# Altium PCB PCB_Keyboard.pcbdoc
Units mm, origin at the board's own origin, x right, y up, seen from the top; angles counter-clockwise.
Board outline 330.48 x 294.76 mm, 2 copper layers (Top Layer, Bottom Layer); 167 components, 120 nets, 594 pads, 52 vias.
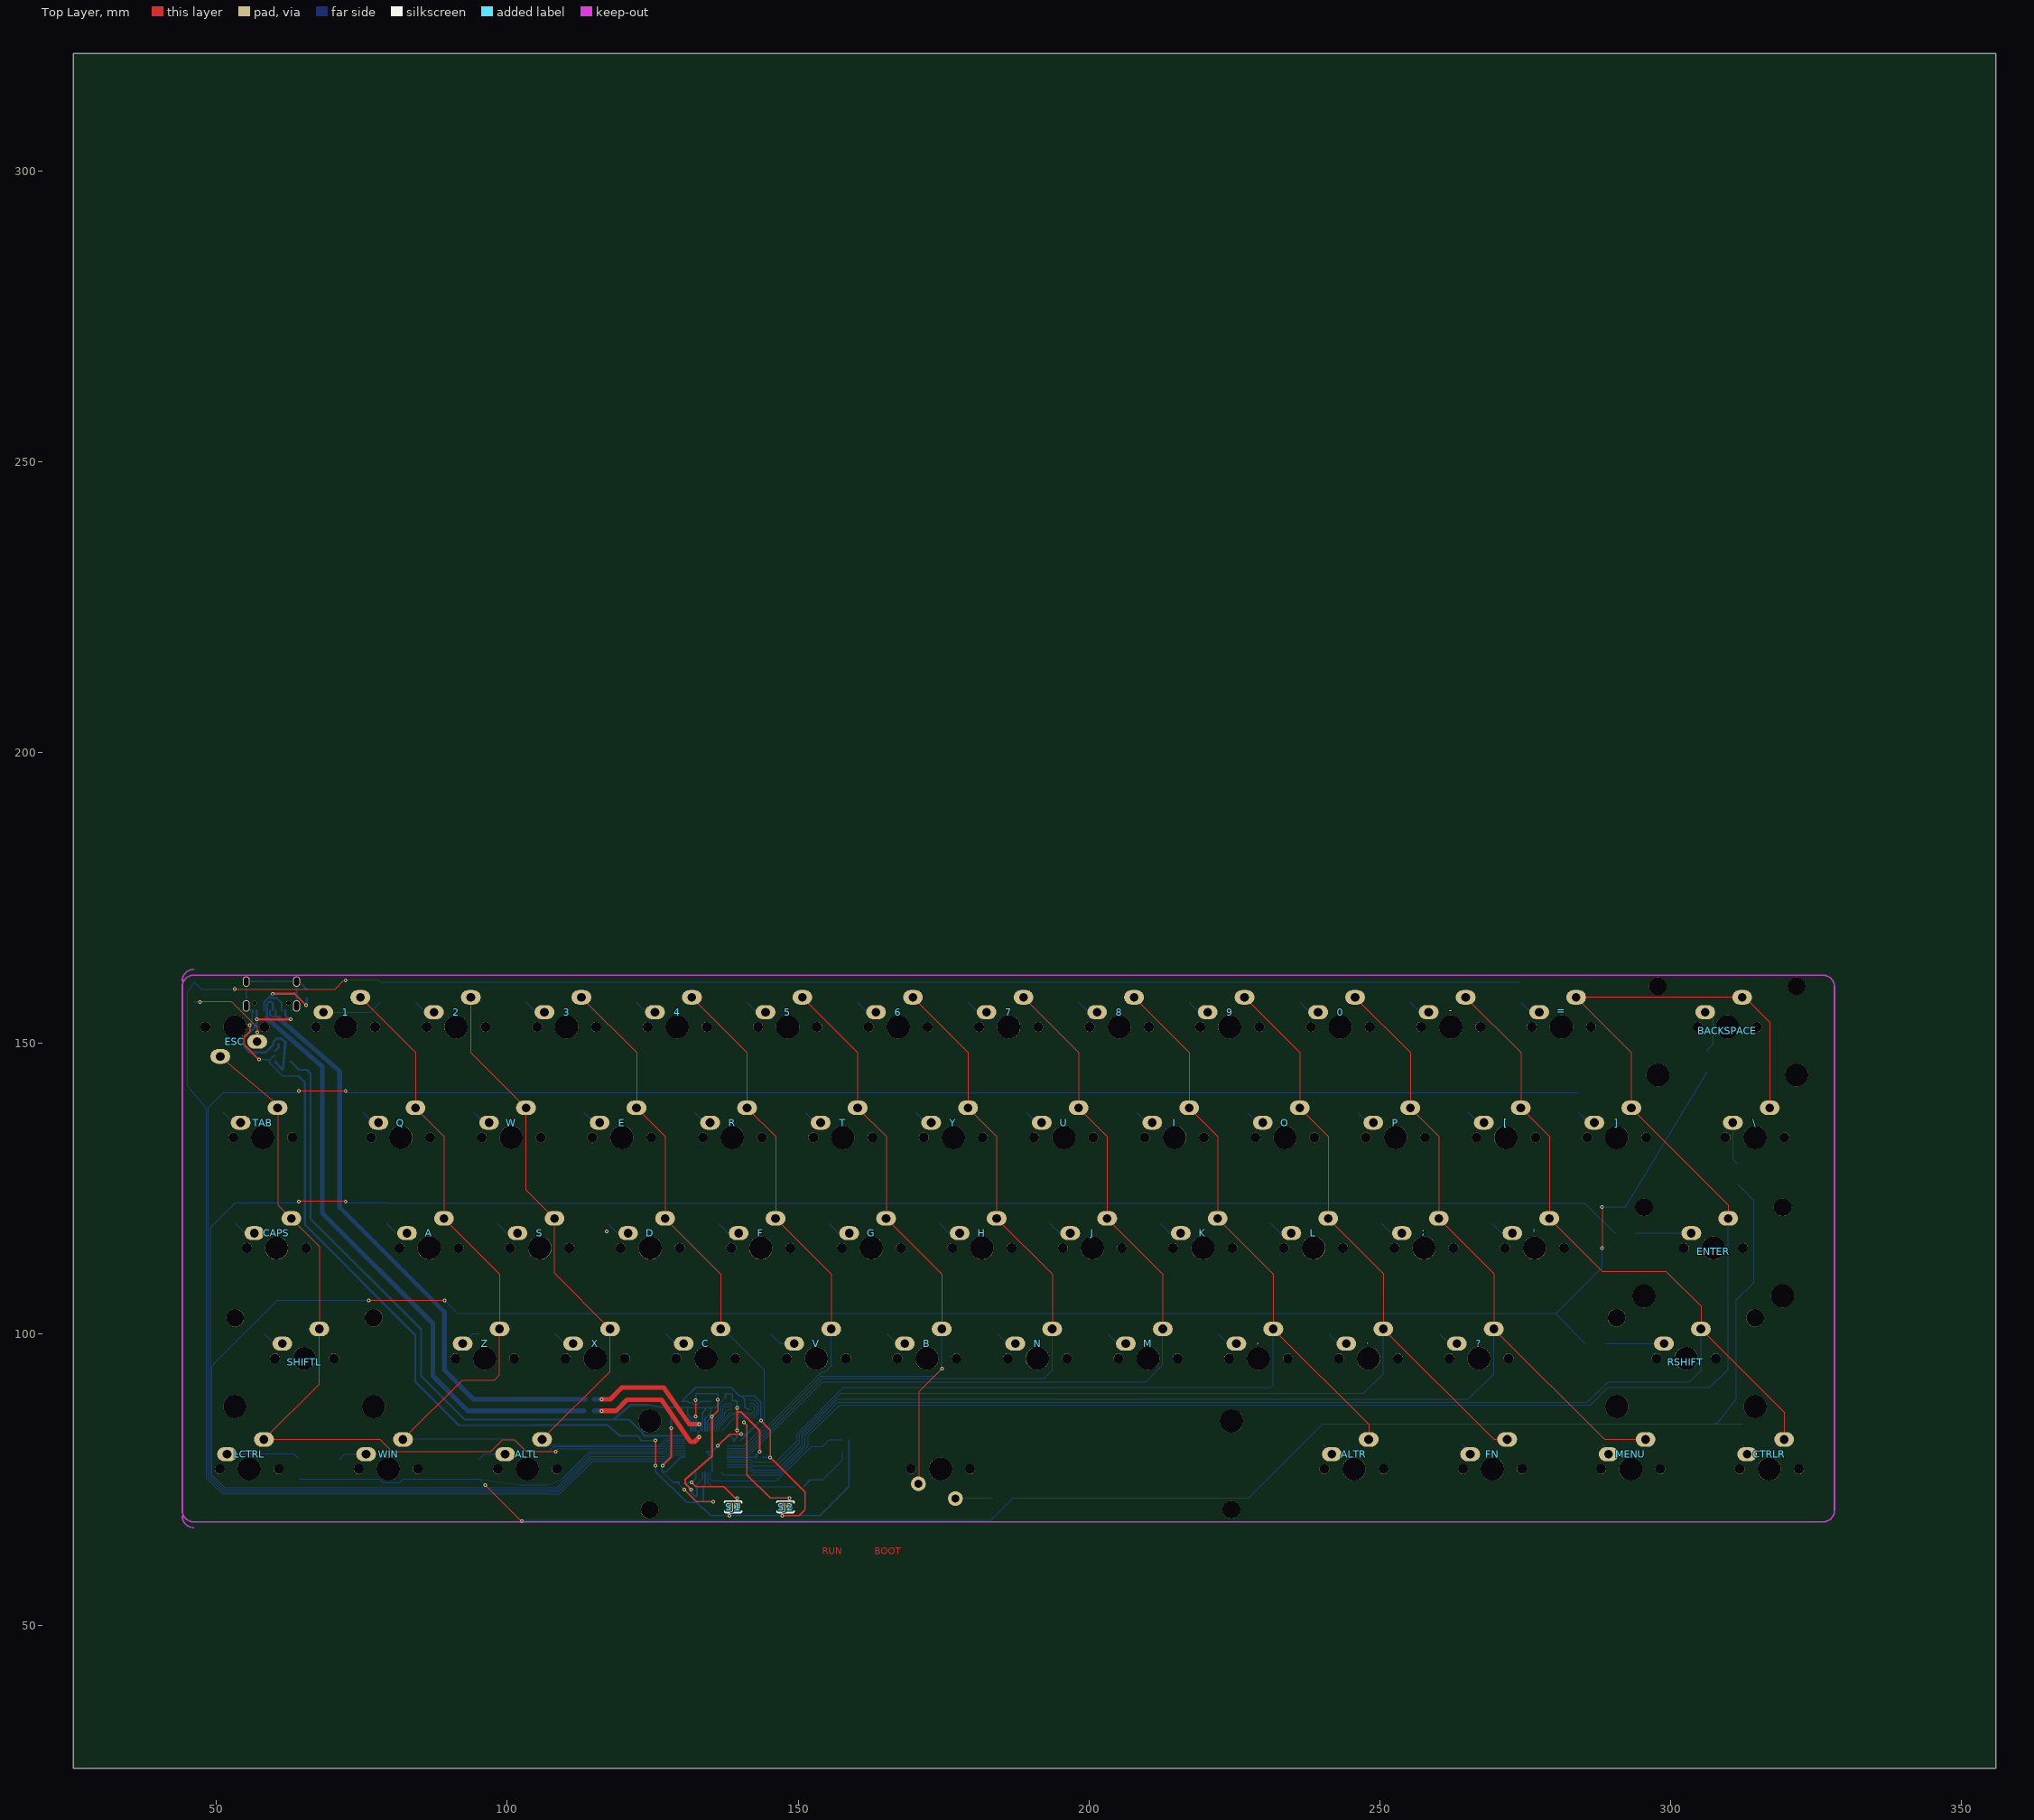
[diagram p0: Top Layer view]
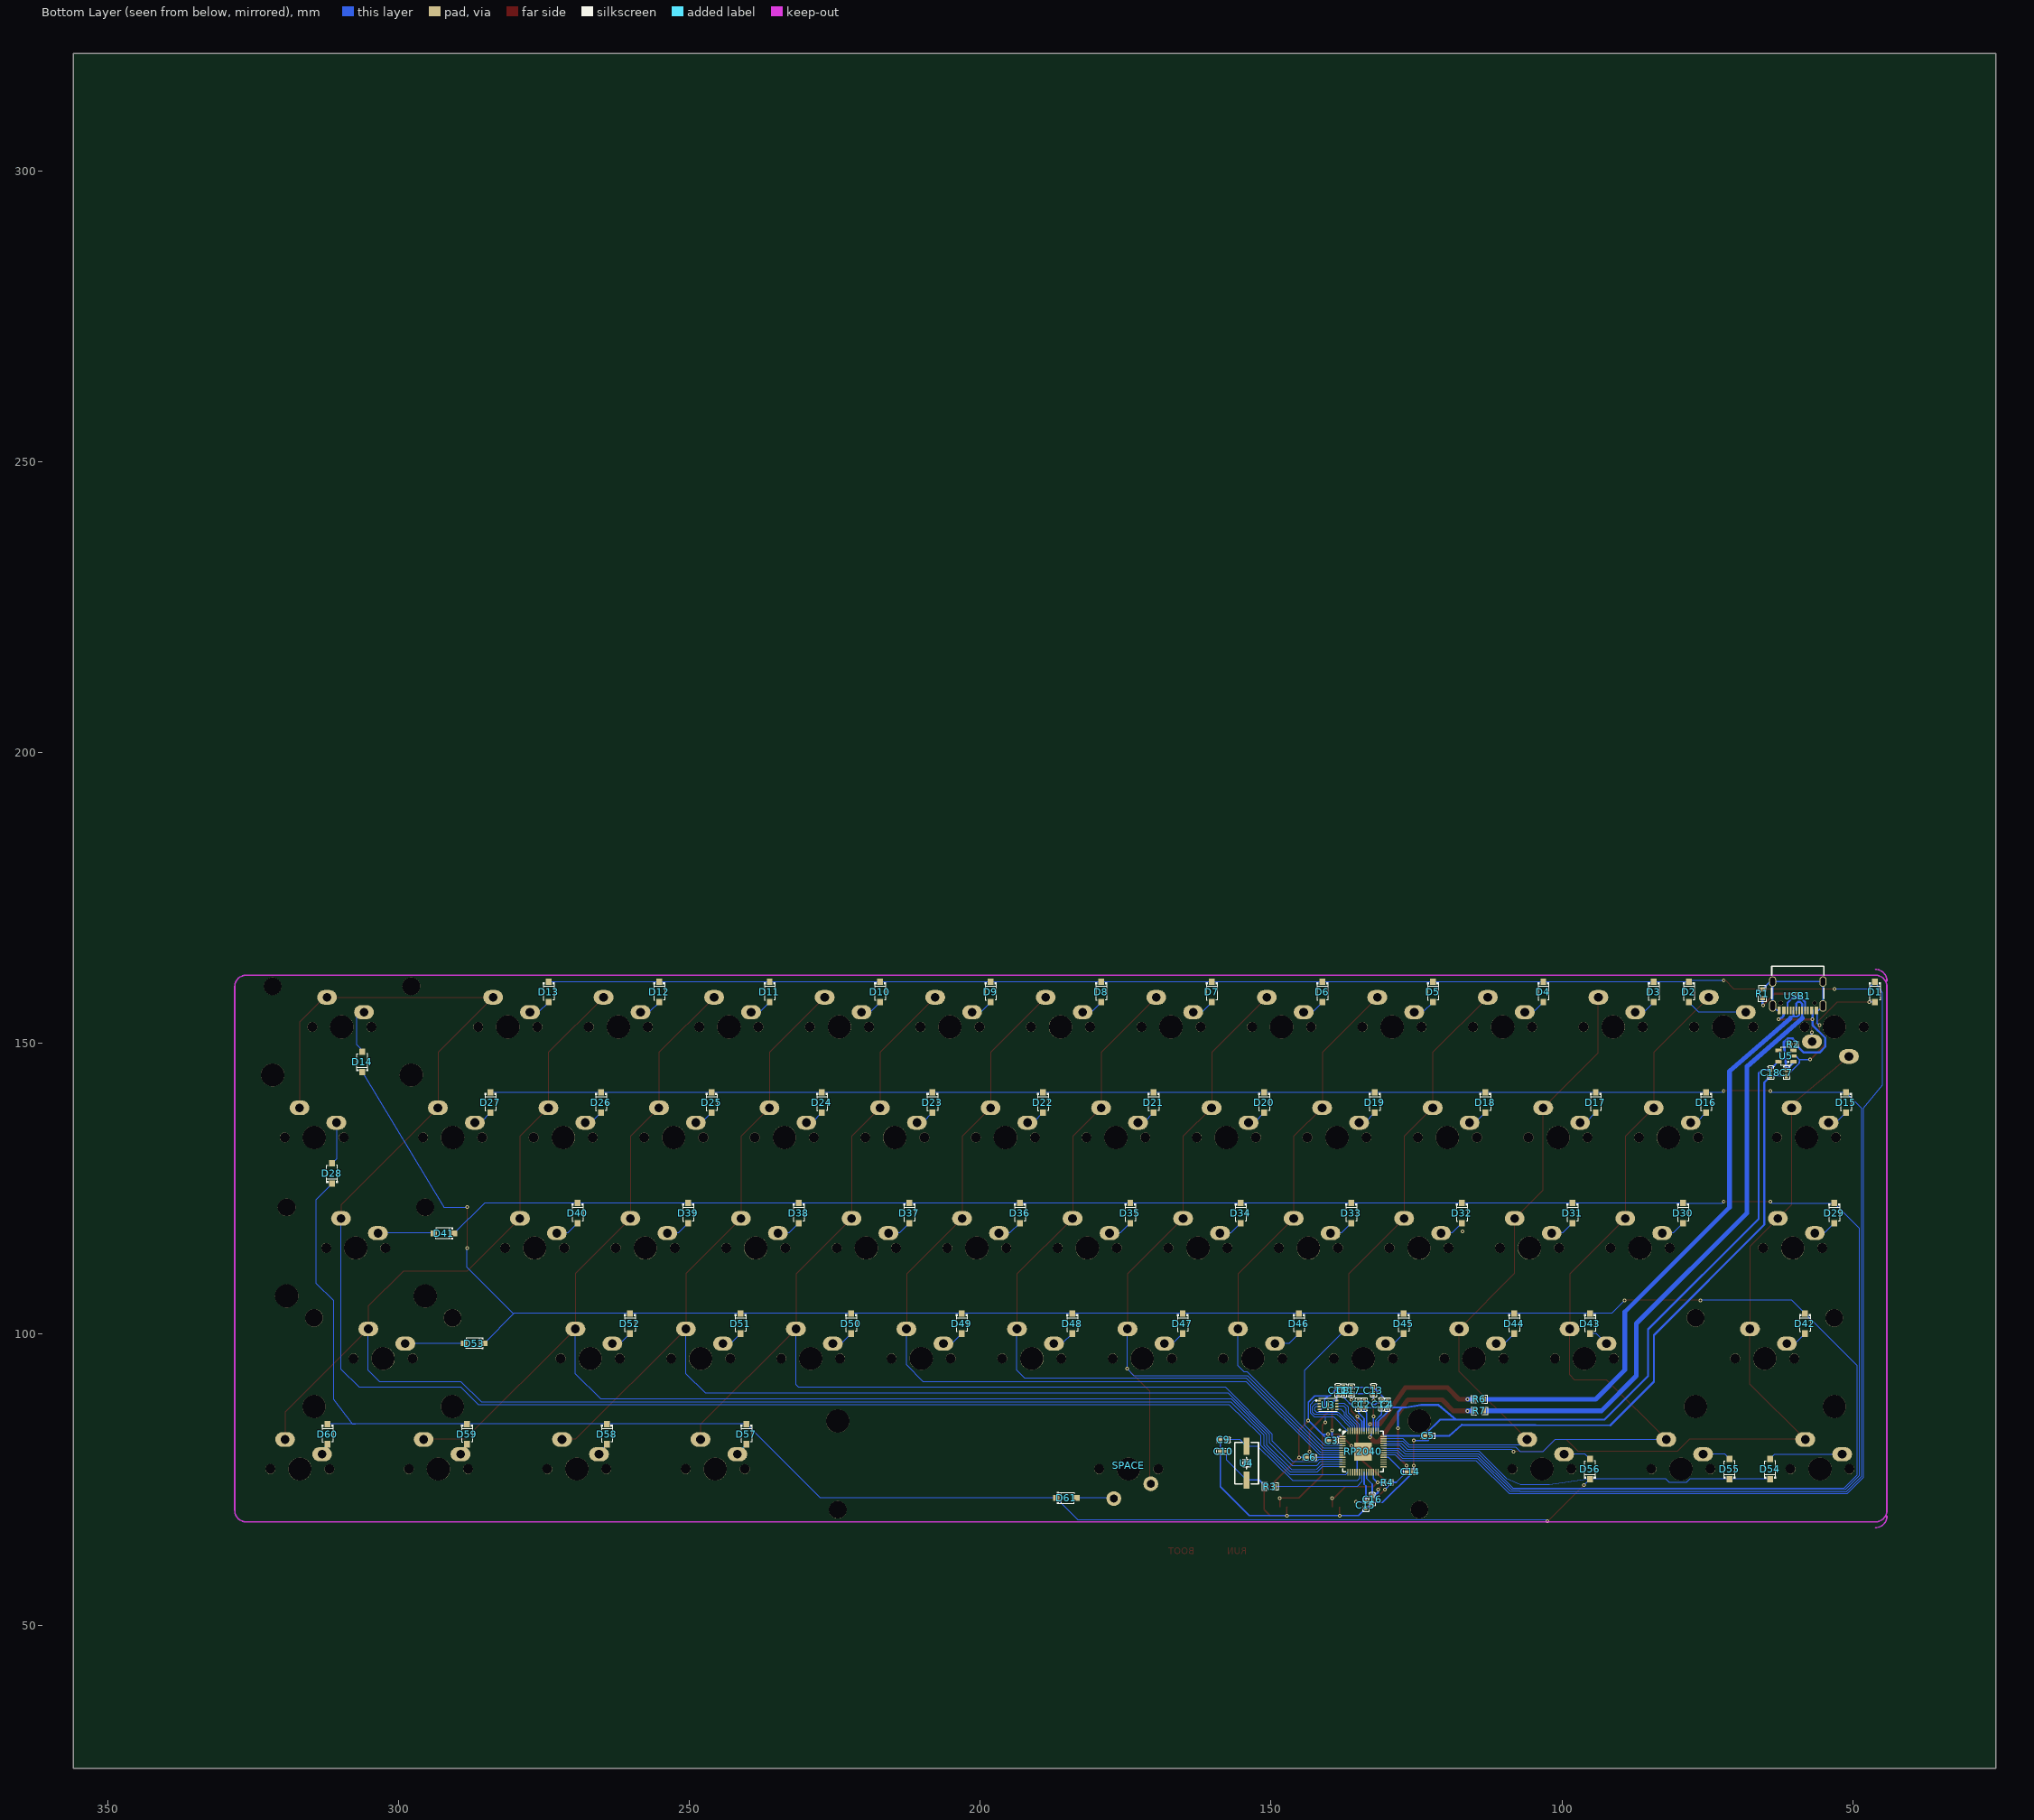
[diagram p1: Bottom Layer view, seen from below]

## Layer stack, top to bottom
Top Layer: signal copper (thickness not stored)
Dielectric: dielectric 0.32, FR-4, Dk 4.8
Bottom Layer: signal copper (thickness not stored)

## Board outline
355.884,25.4 25.4,25.4 25.4,320.157 355.884,320.157

## Components (designator, comment, footprint, x,y, rotation, side; value= is the part's Value field where it differs from the comment)
0 "1U Cherry MX Switch" CHERRY_MX_1U 243.194,152.822 r0 top
1 "1U Cherry MX Switch" CHERRY_MX_1U 72.194,152.822 r0 top
2 "1U Cherry MX Switch" CHERRY_MX_1U 91.194,152.822 r0 top
3 "1U Cherry MX Switch" CHERRY_MX_1U 110.194,152.822 r0 top
4 "1U Cherry MX Switch" CHERRY_MX_1U 129.194,152.822 r0 top
5 "1U Cherry MX Switch" CHERRY_MX_1U 148.194,152.822 r0 top
6 "1U Cherry MX Switch" CHERRY_MX_1U 167.194,152.822 r0 top
7 "1U Cherry MX Switch" CHERRY_MX_1U 186.194,152.822 r0 top
8 "1U Cherry MX Switch" CHERRY_MX_1U 205.194,152.822 r0 top
9 "1U Cherry MX Switch" CHERRY_MX_1U 224.194,152.822 r0 top
' "1U Cherry MX Switch" CHERRY_MX_1U 276.574,114.822 r0 top
, "1U Cherry MX Switch" CHERRY_MX_1U 229.134,95.822 r0 top
- "1U Cherry MX Switch" CHERRY_MX_1U 262.194,152.822 r0 top
. "1U Cherry MX Switch" CHERRY_MX_1U 248.034,95.822 r0 top
; "1U Cherry MX Switch" CHERRY_MX_1U 257.574,114.822 r0 top
= "1U Cherry MX Switch" CHERRY_MX_1U 281.194,152.822 r0 top
? "1U Cherry MX Switch" CHERRY_MX_1U 267.034,95.822 r0 top
[ "1U Cherry MX Switch" CHERRY_MX_1U 271.674,133.822 r0 top
\ "1.5U_CHERRY_MX_SWITCH" CHERRY_MX_1.5U 314.474,133.822 r0 top
] "1U Cherry MX Switch" CHERRY_MX_1U 290.674,133.822 r0 top
A "1U Cherry MX Switch" CHERRY_MX_1U 86.574,114.822 r0 top
ALTL "1.25U_CHERRY_MX_SWITCH" CHERRY_MX_1.25U 103.434,76.822 r0 top
ALTR "1.25U_CHERRY_MX_SWITCH" CHERRY_MX_1.25U 245.534,76.822 r0 top
B "1U Cherry MX Switch" CHERRY_MX_1U 172.134,95.822 r0 top
BACKSPACE "2U_CHERRY_MX_SWITCH" CHERRY_MX_2U 309.734,152.822 r0 top
C "1U Cherry MX Switch" CHERRY_MX_1U 134.134,95.822 r0 top
C1 "100nF" C0402 134.994,87.922 r90 bottom
C2 "100nF" C0402 133.994,87.922 r90 bottom
C3 "100nF" C0402 139.541,81.712 r0 bottom
C4 "100nF" C0402 130.016,87.935 r90 bottom
C5 "100nF" C0402 122.994,82.522 r180 bottom
C6 "100nF" C0402 143.351,78.822 r0 bottom
C7 "1uF" C0402 61.394,144.922 r270 bottom
C8 "100nF" C0402 137.494,90.322 r90 bottom
C9 "22pF" C0402 158.194,81.822 r0 bottom
C10 "22pF" C0402 158.194,79.822 r0 bottom
C11 "2.2uF" C0402 138.494,90.322 r270 bottom
C12 "1uF" C0402 130.994,87.922 r270 bottom
C13 "1uF" C0402 132.394,90.322 r270 bottom
C14 "100nF" C0402 126.079,76.378 r180 bottom
C15 "100nF" C0402 133.694,70.622 r270 bottom
C16 "100nF" C0402 132.594,71.622 r270 bottom
C17 "100nF" C0402 136.194,90.322 r90 bottom
C18 "1uF" C0402 64.094,144.922 r270 bottom
CAPS "1.75U_CHERRY_MX_SWITCH" CHERRY_MX_1.75U 60.334,114.822 r0 top
CTRLR "1.25U_CHERRY_MX_SWITCH" CHERRY_MX_1.25U 316.934,76.822 r0 top
D "1U Cherry MX Switch" CHERRY_MX_1U 124.574,114.822 r0 top
D1 "1N4148W_C81598" SOD-123F_L2.7-W1.6-LS3.8-RD 46.194,158.822 r90 bottom
D2 "1N4148W_C81598" SOD-123F_L2.7-W1.6-LS3.8-RD 78.194,158.822 r90 bottom
D3 "1N4148W_C81598" SOD-123F_L2.7-W1.6-LS3.8-RD 84.194,158.822 r90 bottom
D4 "1N4148W_C81598" SOD-123F_L2.7-W1.6-LS3.8-RD 103.194,158.822 r90 bottom
D5 "1N4148W_C81598" SOD-123F_L2.7-W1.6-LS3.8-RD 122.194,158.822 r90 bottom
D6 "1N4148W_C81598" SOD-123F_L2.7-W1.6-LS3.8-RD 141.194,158.822 r90 bottom
D7 "1N4148W_C81598" SOD-123F_L2.7-W1.6-LS3.8-RD 160.194,158.822 r90 bottom
D8 "1N4148W_C81598" SOD-123F_L2.7-W1.6-LS3.8-RD 179.194,158.822 r90 bottom
D9 "1N4148W_C81598" SOD-123F_L2.7-W1.6-LS3.8-RD 198.194,158.822 r90 bottom
D10 "1N4148W_C81598" SOD-123F_L2.7-W1.6-LS3.8-RD 217.194,158.822 r90 bottom
D11 "1N4148W_C81598" SOD-123F_L2.7-W1.6-LS3.8-RD 236.194,158.822 r90 bottom
D12 "1N4148W_C81598" SOD-123F_L2.7-W1.6-LS3.8-RD 255.194,158.822 r90 bottom
D13 "1N4148W_C81598" SOD-123F_L2.7-W1.6-LS3.8-RD 274.194,158.822 r90 bottom
D14 "1N4148W_C81598" SOD-123F_L2.7-W1.6-LS3.8-RD 306.194,146.822 r270 bottom
D15 "1N4148W_C81598" SOD-123F_L2.7-W1.6-LS3.8-RD 51.194,139.822 r90 bottom
D16 "1N4148W_C81598" SOD-123F_L2.7-W1.6-LS3.8-RD 75.194,139.822 r90 bottom
D17 "1N4148W_C81598" SOD-123F_L2.7-W1.6-LS3.8-RD 94.194,139.822 r90 bottom
D18 "1N4148W_C81598" SOD-123F_L2.7-W1.6-LS3.8-RD 113.194,139.822 r90 bottom
D19 "1N4148W_C81598" SOD-123F_L2.7-W1.6-LS3.8-RD 132.194,139.822 r90 bottom
D20 "1N4148W_C81598" SOD-123F_L2.7-W1.6-LS3.8-RD 151.194,139.822 r90 bottom
D21 "1N4148W_C81598" SOD-123F_L2.7-W1.6-LS3.8-RD 170.194,139.822 r90 bottom
D22 "1N4148W_C81598" SOD-123F_L2.7-W1.6-LS3.8-RD 189.194,139.822 r90 bottom
D23 "1N4148W_C81598" SOD-123F_L2.7-W1.6-LS3.8-RD 208.194,139.822 r90 bottom
D24 "1N4148W_C81598" SOD-123F_L2.7-W1.6-LS3.8-RD 227.194,139.822 r90 bottom
D25 "1N4148W_C81598" SOD-123F_L2.7-W1.6-LS3.8-RD 246.194,139.822 r90 bottom
D26 "1N4148W_C81598" SOD-123F_L2.7-W1.6-LS3.8-RD 265.194,139.822 r90 bottom
D27 "1N4148W_C81598" SOD-123F_L2.7-W1.6-LS3.8-RD 284.194,139.822 r90 bottom
D28 "1N4148W_C81598" SOD-123F_L2.7-W1.6-LS3.8-RD 311.394,127.622 r270 bottom
D29 "1N4148W_C81598" SOD-123F_L2.7-W1.6-LS3.8-RD 53.194,120.822 r90 bottom
D30 "1N4148W_C81598" SOD-123F_L2.7-W1.6-LS3.8-RD 79.194,120.822 r90 bottom
D31 "1N4148W_C81598" SOD-123F_L2.7-W1.6-LS3.8-RD 98.194,120.822 r90 bottom
D32 "1N4148W_C81598" SOD-123F_L2.7-W1.6-LS3.8-RD 117.194,120.822 r90 bottom
D33 "1N4148W_C81598" SOD-123F_L2.7-W1.6-LS3.8-RD 136.194,120.822 r90 bottom
D34 "1N4148W_C81598" SOD-123F_L2.7-W1.6-LS3.8-RD 155.194,120.822 r90 bottom
D35 "1N4148W_C81598" SOD-123F_L2.7-W1.6-LS3.8-RD 174.194,120.822 r90 bottom
D36 "1N4148W_C81598" SOD-123F_L2.7-W1.6-LS3.8-RD 193.194,120.822 r90 bottom
D37 "1N4148W_C81598" SOD-123F_L2.7-W1.6-LS3.8-RD 212.194,120.822 r90 bottom
D38 "1N4148W_C81598" SOD-123F_L2.7-W1.6-LS3.8-RD 231.194,120.822 r90 bottom
D39 "1N4148W_C81598" SOD-123F_L2.7-W1.6-LS3.8-RD 250.194,120.822 r90 bottom
D40 "1N4148W_C81598" SOD-123F_L2.7-W1.6-LS3.8-RD 269.194,120.822 r90 bottom
D41 "1N4148W_C81598" SOD-123F_L2.7-W1.6-LS3.8-RD 292.194,117.322 r180 bottom
D42 "1N4148W_C81598" SOD-123F_L2.7-W1.6-LS3.8-RD 58.194,101.822 r90 bottom
D43 "1N4148W_C81598" SOD-123F_L2.7-W1.6-LS3.8-RD 95.194,101.822 r90 bottom
D44 "1N4148W_C81598" SOD-123F_L2.7-W1.6-LS3.8-RD 108.194,101.822 r90 bottom
D45 "1N4148W_C81598" SOD-123F_L2.7-W1.6-LS3.8-RD 127.194,101.822 r90 bottom
D46 "1N4148W_C81598" SOD-123F_L2.7-W1.6-LS3.8-RD 145.194,101.822 r90 bottom
D47 "1N4148W_C81598" SOD-123F_L2.7-W1.6-LS3.8-RD 165.194,101.822 r90 bottom
D48 "1N4148W_C81598" SOD-123F_L2.7-W1.6-LS3.8-RD 184.194,101.822 r90 bottom
D49 "1N4148W_C81598" SOD-123F_L2.7-W1.6-LS3.8-RD 203.194,101.822 r90 bottom
D50 "1N4148W_C81598" SOD-123F_L2.7-W1.6-LS3.8-RD 222.194,101.822 r90 bottom
D51 "1N4148W_C81598" SOD-123F_L2.7-W1.6-LS3.8-RD 241.194,101.822 r90 bottom
D52 "1N4148W_C81598" SOD-123F_L2.7-W1.6-LS3.8-RD 260.194,101.822 r90 bottom
D53 "1N4148W_C81598" SOD-123F_L2.7-W1.6-LS3.8-RD 286.994,98.422 r180 bottom
D54 "1N4148W_C81598" SOD-123F_L2.7-W1.6-LS3.8-RD 64.194,76.822 r270 bottom
D55 "1N4148W_C81598" SOD-123F_L2.7-W1.6-LS3.8-RD 71.194,76.822 r270 bottom
D56 "1N4148W_C81598" SOD-123F_L2.7-W1.6-LS3.8-RD 95.194,76.822 r270 bottom
D57 "1N4148W_C81598" SOD-123F_L2.7-W1.6-LS3.8-RD 240.194,82.822 r90 bottom
D58 "1N4148W_C81598" SOD-123F_L2.7-W1.6-LS3.8-RD 264.194,82.822 r90 bottom
D59 "1N4148W_C81598" SOD-123F_L2.7-W1.6-LS3.8-RD 288.194,82.822 r90 bottom
D60 "1N4148W_C81598" SOD-123F_L2.7-W1.6-LS3.8-RD 312.194,82.822 r90 bottom
D61 "1N4148W_C81598" SOD-123F_L2.7-W1.6-LS3.8-RD 185.194,71.822 r0 bottom
E "1U Cherry MX Switch" CHERRY_MX_1U 119.674,133.822 r0 top
ENTER "2.25U_CHERRY_MX_SWITCH" CHERRY_MX_2.25U 307.334,114.822 r0 top
ESC "1U Cherry MX Switch" CHERRY_MX_1U 53.194,152.822 r180 top
F "1U Cherry MX Switch" CHERRY_MX_1U 143.574,114.822 r0 top
FN "1.25U_CHERRY_MX_SWITCH" CHERRY_MX_1.25U 269.334,76.822 r0 top
G "1U Cherry MX Switch" CHERRY_MX_1U 162.574,114.822 r0 top
H "1U Cherry MX Switch" CHERRY_MX_1U 181.574,114.822 r0 top
I "1U Cherry MX Switch" CHERRY_MX_1U 214.674,133.822 r0 top
J "1U Cherry MX Switch" CHERRY_MX_1U 200.574,114.822 r0 top
K "1U Cherry MX Switch" CHERRY_MX_1U 219.574,114.822 r0 top
L "1U Cherry MX Switch" CHERRY_MX_1U 238.574,114.822 r0 top
LCTRL "1.25U_CHERRY_MX_SWITCH" CHERRY_MX_1.25U 55.634,76.822 r0 top
M "1U Cherry MX Switch" CHERRY_MX_1U 210.134,95.822 r0 top
MENU "1.25U_CHERRY_MX_SWITCH" CHERRY_MX_1.25U 293.134,76.822 r0 top
N "1U Cherry MX Switch" CHERRY_MX_1U 191.134,95.822 r0 top
O "1U Cherry MX Switch" CHERRY_MX_1U 233.674,133.822 r0 top
P "1U Cherry MX Switch" CHERRY_MX_1U 252.674,133.822 r0 top
Q "1U Cherry MX Switch" CHERRY_MX_1U 81.674,133.822 r0 top
R "1U Cherry MX Switch" CHERRY_MX_1U 138.674,133.822 r0 top
R1 "5.1k" R0603 65.534,158.522 r270 bottom
R2 "10kΩ" R0402 60.234,149.822 r0 bottom
R3 "1kΩ" R0603 150.194,73.822 r180 bottom
R4 "10kΩ" R0402 129.994,74.522 r180 bottom
R6 "27Ω" R0603 114.194,88.822 r0 bottom
R7 "27Ω" R0603 114.194,86.822 r180 bottom
RP2040 "RP2040" LQFN-56_L7.0-W7.0-P0.4-EP 134.194,79.822 r0 bottom
RSHIFT "2.75U_CHERRY_MX_SWITCH" CHERRY_MX_2.75U 302.634,95.822 r0 top
S "1U Cherry MX Switch" CHERRY_MX_1U 105.574,114.822 r0 top
SHIFTL "2.25U_CHERRY_MX_SWITCH" CHERRY_MX_2.25U 65.134,95.822 r0 top
SJ1 "JUMPER-PAD-2" PAD-JUMPER-2 138.194,70.322 r0 top
SJ2 "JUMPER-PAD-2" PAD-JUMPER-2 147.194,70.322 r0 top
SPACE "KEYSWITCH-PLAIN-MX-6.25U" MX-6.25U 174.484,76.822 r180 bottom
T "1U Cherry MX Switch" CHERRY_MX_1U 157.674,133.822 r0 top
TAB "1.5U_CHERRY_MX_SWITCH" CHERRY_MX_1.5U 57.964,133.822 r0 top
U "1U Cherry MX Switch" CHERRY_MX_1U 195.674,133.822 r0 top
U3 "W25Q16JVUXIQ" USON-8_L3.0-W2.0-P0.50-BL-EP 140.194,87.822 r90 bottom
U4 "12MHz" HC-49S_L7.0-W4.0 154.194,77.822 r90 bottom
U5 "TPTLV70233DBVR" SOT-23-5_L3.0-W1.7-P0.95-LS2.8-BR 61.494,147.822 r0 bottom
USB1 "USB-TYPE-C-018" USB-C_SMD-TYPE-C-31-M-12 59.454,158.136 r180 bottom
V "1U Cherry MX Switch" CHERRY_MX_1U 153.134,95.822 r0 top
W "1U Cherry MX Switch" CHERRY_MX_1U 100.674,133.822 r0 top
WIN "1.25U_CHERRY_MX_SWITCH" CHERRY_MX_1.25U 79.534,76.822 r0 top
X "1U Cherry MX Switch" CHERRY_MX_1U 115.134,95.822 r0 top
Y "1U Cherry MX Switch" CHERRY_MX_1U 176.674,133.822 r0 top
Z "1U Cherry MX Switch" CHERRY_MX_1U 96.134,95.822 r0 top
? "" ? 199.634,169.181 r0 top
? "" ? 47.143,108.222 r0 top
? "" ? 243.384,58.239 r0 top
? "" ? 133.885,56.544 r0 top
? "" ? 139.007,57.486 r0 top
? "" ? 139.084,62.339 r0 top
? "" ? 174.784,62.099 r0 top
? "" ? 174.734,62.94 r0 top
? "" ? 139.034,69.307 r0 top
? "" ? 139.034,65.417 r0 top
? "" ? 139.084,61.139 r0 top
? "" ? 138.984,63.589 r0 top
? "" ? 138.984,65.484 r0 top
? "" ? 210.134,60.192 r0 top

## Footprints (in the part's own frame and the unit in brackets; to place one, negate y for a bottom-side part, rotate by r counter-clockwise, add the part's x,y. Pads: shape width x height; smd on the part's side, far side on the other; paste and mask are expansions set on the pad)
C0402 [mm]
  rect 0.79x0.54 smd paste-100 mask+0.051: 1(0.545,0) 2(-0.545,0)
  silkscreen extent -1.17,-0.5 1.17,0.5
CHERRY_MX_1.5U [mm]
  oval 3.4x2.4 hole 1.5 paste+0 mask+0.051: 1(-3.81,2.54)
  oval 3.4x2.5 hole 1.5 paste+0 mask+0.051: 2(2.54,5.08)
  round 1.7 hole 1.7 unplated paste+0: ""(-5.08,0) ""(5.08,0)
  round 4 hole 4 unplated paste+0: ""(0,0)
CHERRY_MX_1.25U [mm]
  oval 3.4x2.4 hole 1.5 paste+0 mask+0.051: 1(-3.81,2.54)
  oval 3.4x2.5 hole 1.5 paste+0 mask+0.051: 2(2.54,5.08)
  round 1.7 hole 1.7 unplated paste+0: ""(-5.08,0) ""(5.08,0)
  round 4 hole 4 unplated paste+0: ""(0,0)
CHERRY_MX_1.75U [mm]
  oval 3.4x2.4 hole 1.5 paste+0 mask+0.051: 1(-3.81,2.54)
  oval 3.4x2.5 hole 1.5 paste+0 mask+0.051: 2(2.54,5.08)
  round 1.7 hole 1.7 unplated paste+0: ""(-5.08,0) ""(5.08,0)
  round 4 hole 4 unplated paste+0: ""(0,0)
CHERRY_MX_1U [mm]
  oval 3.4x2.4 hole 1.5 paste+0 mask+0.051: 1(-3.81,2.54)
  oval 3.4x2.5 hole 1.5 paste+0 mask+0.051: 2(2.54,5.08)
  round 1.7 hole 1.7 unplated paste+0: ""(-5.08,0) ""(5.08,0)
  round 4 hole 4 unplated paste+0: ""(0,0)
CHERRY_MX_2.25U [mil]
  oval 133.86x94.49 hole 59.06 paste+0 mask+2: 1(-150,100)
  oval 133.86x98.42 hole 59.06 paste+0 mask+2: 2(100,200)
  round 157 hole 157 unplated paste+0: ""(-470,-325) ""(467.6,-325)
  round 120 hole 120 unplated paste+0: ""(-470,275) ""(467.6,275)
  round 66.93 hole 66.93 unplated paste+0: ""(-200,0) ""(200,0)
  round 157.48 hole 157.48 unplated paste+0: ""(0,0)
CHERRY_MX_2.75U [mil]
  oval 133.86x94.49 hole 59.06 paste+0 mask+2: 1(-150,100)
  oval 133.86x98.42 hole 59.06 paste+0 mask+2: 2(100,200)
  round 157 hole 157 unplated paste+0: ""(-470,-325) ""(467.59,-325)
  round 120 hole 120 unplated paste+0: ""(-470,275) ""(467.59,275)
  round 66.93 hole 66.93 unplated paste+0: ""(-200,0) ""(200,0)
  round 157.48 hole 157.48 unplated paste+0: ""(0,0)
CHERRY_MX_2U [mil]
  oval 133.86x94.49 hole 59.06 paste+0 mask+2: 1(-150,100)
  oval 133.86x98.42 hole 59.06 paste+0 mask+2: 2(100,200)
  round 157 hole 157 unplated paste+0: ""(-470,-325.01) ""(467.6,-325.01)
  round 120 hole 120 unplated paste+0: ""(-470,274.99) ""(467.6,274.99)
  round 66.93 hole 66.93 unplated paste+0: ""(-200,-0.01) ""(200,-0.01)
  round 157.48 hole 157.48 unplated paste+0: ""(0,-0.01)
HC-49S_L7.0-W4.0 [mm]
  rect 3x1 smd paste+0 mask+0.051: 1(2.9,0) 2(-2.9,0)
  silkscreen extent -3.56,-2.03 3.56,2.03
LQFN-56_L7.0-W7.0-P0.4-EP [mm]
  rect 1.1x0.2 smd paste-100 mask+0.05: 1(3.55,-2.6) 2(3.55,-2.2) 3(3.55,-1.8) 4(3.55,-1.4) 5(3.55,-1) 6(3.55,-0.6) 7(3.55,-0.2) 8(3.55,0.2) 9(3.55,0.6) 10(3.55,1) 11(3.55,1.4) 12(3.55,1.8) 13(3.55,2.2) 14(3.55,2.6) 29(-3.55,2.6) 30(-3.55,2.2) 31(-3.55,1.8) 32(-3.55,1.4) 33(-3.55,1) 34(-3.55,0.6) 35(-3.55,0.2) 36(-3.55,-0.2) 37(-3.55,-0.6) 38(-3.55,-1) 39(-3.55,-1.4) 40(-3.55,-1.8) 41(-3.55,-2.2) 42(-3.55,-2.6)
  rect 0.2x1.1 smd paste-100 mask+0.05: 15(2.6,3.55) 16(2.2,3.55) 17(1.8,3.55) 18(1.4,3.55) 19(1,3.55) 20(0.6,3.55) 21(0.2,3.55) 22(-0.2,3.55) 23(-0.6,3.55) 24(-1,3.55) 25(-1.4,3.55) 26(-1.8,3.55) 27(-2.2,3.55) 28(-2.6,3.55) 43(-2.6,-3.55) 44(-2.2,-3.55) 45(-1.8,-3.55) 46(-1.4,-3.55) 47(-1,-3.55) 48(-0.6,-3.55) 49(-0.2,-3.55) 50(0.2,-3.55) 51(0.6,-3.55) 52(1,-3.55) 53(1.4,-3.55) 54(1.8,-3.55) 55(2.2,-3.55) 56(2.6,-3.55)
  rect 3.1x3.1 smd paste-100 mask+0.05: 57(0,0)
  silkscreen extent -3.5,-3.83 4.13,3.5
MX-6.25U [mm]
  round 2.54 hole 1.3 slot 1.305 at 0 deg paste+0 mask+0.051: MX1(3.81,-2.54) MX2(-2.54,-5.08)
  round 3.05 hole 3.05 unplated paste+0: ""(-50,-7) ""(50,-7)
  round 4 hole 4 unplated paste+0: ""(-50,8.24) ""(0,0) ""(50,8.24)
  round 1.7 hole 1.7 unplated paste+0: ""(-5.08,0) ""(5.08,0)
PAD-JUMPER-2 [mm]
  rect 1x1.5 smd paste+0 mask+0.102: 1(0,0) 2(1.3,0)
  silkscreen extent -0.85,-1 2.1,1
R0402 [mm]
  rect 0.566x0.54 smd paste-100 mask+0.051: 1(0.433,0) 2(-0.433,0)
  silkscreen extent -0.94,-0.5 0.94,0.5
R0603 [mm]
  rect 0.806x0.864 smd paste-100 mask+0.051: 1(0.753,0) 2(-0.753,0)
  silkscreen extent -1.39,-0.66 1.39,0.66
SOD-123F_L2.7-W1.6-LS3.8-RD [mm]
  rect 1.1x1 smd paste+0 mask+0.051: 1(1.735,0) 2(-1.735,0)
  silkscreen extent -1.38,-1 1.6,1
SOT-23-5_L3.0-W1.7-P0.95-LS2.8-BR [mm]
  rect 1.1x0.6 smd paste+0 mask+0.051: 1(-1.3,0.95) 2(-1.3,0) 3(-1.3,-0.95) 4(1.3,-0.95) 5(1.3,0.95)
  silkscreen extent -0.9,-1.55 0.9,1.55
USB-C_SMD-TYPE-C-31-M-12 [mm]
  oval 1.2x2 hole 0.8 slot 1.6 at 90 deg paste+0 mask+0.051: 0(4.325,-1.706) 1(-4.325,-1.706)
  oval 1.2x1.8 hole 0.8 slot 1.4 at 90 deg paste+0 mask+0.051: 2(-4.325,2.474) 3(4.325,2.474)
  rect 0.3x1.3 smd paste-100 mask+0.051: A1(3.35,-2.474) A4(2.55,-2.474) A5(1.25,-2.474) A6(0.25,-2.474) A7(-0.25,-2.474) A8(-1.25,-2.474) A9(-2.55,-2.474) A12(-3.35,-2.474) B1(-3.05,-2.474) B4(-2.25,-2.474) B5(-1.75,-2.474) B6(-0.75,-2.474) B7(0.75,-2.474) B8(1.75,-2.474) B9(2.25,-2.474) B12(3.05,-2.474)
  round 0.75 hole 0.75 unplated paste+0: ""(-2.9,-1.206) ""(2.9,-1.206)
  silkscreen extent -4.47,-0.49 4.47,5.09
USON-8_L3.0-W2.0-P0.50-BL-EP [mm]
  rect 0.28x0.6 smd paste+0 mask+0.051: 1(0.75,1.507) 2(0.25,1.507) 3(-0.25,1.507) 4(-0.75,1.507) 5(-0.75,-1.508) 6(-0.25,-1.507) 7(0.25,-1.508) 8(0.75,-1.507)
  rect 1.7x0.3 smd paste+0 mask+0.051: 9(0,0)
  silkscreen extent -1.08,-1.58 1.08,2.13
? [mm]

## Via types
v1: diameter 0.62, hole 0.31, Top Layer to Bottom Layer, tented both sides, 51 vias
v2: diameter 0.61, hole 0.305, Top Layer to Bottom Layer, tented both sides, 1 vias

## Nets (pads, with @x,y where several pads share a name; then routed paths per layer and width w, separated by ;. In a path a pad name is that pad's centre, name@x,y a point inside that pad or via, vN(x,y) a via of type N, cw(c..) or ccw(c..) an arc to the next point about the centre after c; other vN are vias at no path point)
0_1: 0.1 D11.2 | length 3.9
  Bottom Layer w0.15: D11.2 237.919,155.362 0.1
1.1V: C13.1 C16.2 C17.2 RP2040.23 RP2040.45 RP2040.50 | length 38.7
  Top Layer w0.25: v1(132.394,85.822) v1(132.394,88.622) ; v1(135.194,85.822) 136.194,86.822 v1(136.194,88.722)
  Top Layer w0.35: v1(131.594,73.322) 130.593,74.323 130.593,75.022 135.193,79.022 v1(135.194,85.822)
  Bottom Layer w0.25: RP2040.45 v1(132.394,85.822) ; v1(132.394,88.622) C13.1 C17.2 v1(136.194,88.722) ; C16.2 132.594,74.222 133.594,75.222 RP2040.23 ; RP2040.50 134.394,85.022 v1(135.194,85.822)
  Bottom Layer w0.35: v1(131.594,73.322) 131.594,72.822 132.249,72.167 C16.2
1_1: 1.1 D2.2 | length 10.5
  Bottom Layer w0.15: 1.1 76.469,155.362 D2.2
2_1: 2.1 D3.2 | length 3.9
  Bottom Layer w0.15: D3.2 85.919,155.362 2.1
3_1: 3.1 D4.2 | length 3.9
  Bottom Layer w0.15: D4.2 104.919,155.362 3.1
4_1: 4.1 D5.2 | length 3.9
  Bottom Layer w0.15: D5.2 123.919,155.362 4.1
5_1: 5.1 D6.2 | length 3.9
  Bottom Layer w0.15: D6.2 142.919,155.362 5.1
6_1: 6.1 D7.2 | length 3.9
  Bottom Layer w0.15: D7.2 161.919,155.362 6.1
7_1: 7.1 D8.2 | length 3.9
  Bottom Layer w0.15: D8.2 180.919,155.362 7.1
8_1: 8.1 D9.2 | length 3.9
  Bottom Layer w0.15: D9.2 199.919,155.362 8.1
9_1: 9.1 D10.2 | length 3.9
  Bottom Layer w0.15: D10.2 218.919,155.362 9.1
'_1: '.1 D40.2 | length 4.3
  Bottom Layer w0.15: D40.2 270.919,117.362 '.1
,_1: ,.1 D50.2 | length 3.8
  Bottom Layer w0.15: D50.2 223.919,98.362 225.324,98.362
-_1: -.1 D12.2 | length 3.9
  Bottom Layer w0.15: D12.2 256.919,155.362 -.1
._1: ..1 D51.2 | length 3.7
  Bottom Layer w0.15: D51.2 242.919,98.362 ..1
;_1: ;.1 D39.2 | length 4.3
  Bottom Layer w0.15: D39.2 251.919,117.362 253.764,117.362
=_1: =.1 D13.2 | length 3.9
  Bottom Layer w0.15: D13.2 275.919,155.362 =.1
?_1: ?.1 D52.2 | length 3.7
  Bottom Layer w0.15: D52.2@260.194,100.087 261.919,98.362 ?.1
[_1: [.1 D26.2 | length 3.4
  Bottom Layer w0.15: D26.2 266.919,136.362 [.1
\_1: \.1 D28.2 | length 7.3
  Bottom Layer w0.15: \.1@310.664,136.362 310.664,130.087 D28.2
]_1: ].1 D27.2 | length 3.4
  Bottom Layer w0.15: D27.2 285.919,136.362 ].1
A_1: A.1 D30.2 | length 4.3
  Bottom Layer w0.15: D30.2 80.919,117.362 A.1
ALTL_1: ALTL.1 D56.2 | length 4.8
  Bottom Layer w0.15: D56.2 95.999,79.362 ALTL.1
ALTR_1: ALTR.1 D57.2 | length 2.4
  Bottom Layer w0.15: D57.2 241.724,79.557 ALTR.1
B_1: B.1 D47.2 | length 3.8
  Bottom Layer w0.15: D47.2 166.919,98.362 B.1
BACKSPACE_1: BACKSPACE.1 D14.2 | length 7.6
  Bottom Layer w0.15: D14.2 306.194,148.822 307.194,149.822 307.194,154.552 BACKSPACE.1@306.384,155.362
C_1: C.1 D45.2 | length 3.8
  Bottom Layer w0.15: D45.2 128.919,98.362 C.1
CAPS_1: CAPS.1 D29.2 | length 4
  Bottom Layer w0.15: D29.2 54.919,117.362 CAPS.1
CC: R1.1 USB1.A5 USB1.B5 | length 15.3
  Top Layer w0.35: v1(59.634,158.522) 63.434,158.522 v1@65.434,156.522
  Bottom Layer w0.35: USB1.A5 58.204,157.092 58.934,157.822 60.334,157.822 61.204,156.952 USB1.B5 ; 58.934,157.821 v1(59.634,158.522) ; v1@65.434,156.522 65.534,156.622 R1.1
  other v1: 65.434,156.522
COL1: CAPS.2 ESC.2 LCTRL.2 RP2040.39 SHIFTL.2 TAB.2 | length 152.9
  Top Layer w0.15: ESC.2@50.634,147.722 60.574,139.442 TAB.2@60.574,138.901 ; TAB.2@60.574,138.902 60.574,122.202 CAPS.2 67.674,115.102 SHIFTL.2 67.674,91.402 LCTRL.2 78.114,81.902 80.194,79.822 97.194,79.822 99.194,81.822 101.194,81.822 103.194,79.822 v1@108.294,79.822
  Bottom Layer w0.15: v1@108.294,79.822 108.693,80.221 126.562,80.221 127.56,81.222 RP2040.39
  other v1: 108.294,79.822
COL2: 1.2 A.2 Q.2 RP2040.40 WIN.2 Z.2 | length 146.2
  Top Layer w0.15: 1.2 84.214,148.422 Q.2 89.114,134.002 A.2 98.674,110.342 Z.2 98.674,93.002 97.794,92.122 92.294,92.122 WIN.2
  Bottom Layer w0.15: WIN.2 101.114,81.902 103.194,79.822 107.194,79.822 107.994,80.622 126.394,80.622 127.394,81.622 RP2040.40
COL3: 2.2 ALTL.2 RP2040.41 S.2 W.2 X.2 | length 116.3
  Top Layer w0.15: 2.2 93.734,148.382 W.2 103.214,124.802 S.2 108.114,110.462 X.2 117.674,93.602 ALTL.2
  Bottom Layer w0.15: ALTL.2 106.954,80.922 126.194,80.922 127.294,82.022 RP2040.41
COL4: 3.2 C.2 D.2 E.2 RP2040.5 | length 94.8
  Top Layer w0.15: 3.2 122.214,148.422 E.2 127.114,134.002 D.2 136.674,110.342 C.2
  Bottom Layer w0.15: C.2 137.115,100.902 144.195,93.823 144.195,84.333 140.684,80.823 RP2040.5
COL5: 4.2 F.2 R.2 RP2040.6 V.2 | length 97
  Top Layer w0.15: 4.2 141.214,148.422 R.2 146.114,134.002 F.2 155.674,110.342 V.2
  Bottom Layer w0.15: RP2040.6 140.918,80.422 154.018,93.522 154.594,93.522 155.674,94.602 V.2
COL6: 5.2 B.2 G.2 RP2040.7 SPACE.MX1 T.2 | length 138
  Top Layer w0.15: 5.2 160.214,148.422 T.2 165.114,134.002 165.114,119.902 174.674,110.342 B.2 ; SPACE.MX1@170.824,74.282 170.824,90.152 v1(174.734,94.062)
  Bottom Layer w0.15: RP2040.7 141.153,80.022 153.953,92.822 173.494,92.822 v1(174.734,94.062) 174.674,94.122 B.2
COL7: 6.2 H.2 N.2 RP2040.8 Y.2 | length 135.8
  Top Layer w0.15: 6.2 179.214,148.422 Y.2 184.114,134.002 H.2 193.674,110.342 N.2
  Bottom Layer w0.15: RP2040.8 141.388,79.622 154.188,92.422 192.294,92.422 193.674,93.802 N.2
COL8: 7.2 J.2 M.2 RP2040.9 U.2 | length 154.5
  Top Layer w0.15: 7.2 198.214,148.422 U.2 203.114,134.002 J.2 212.674,110.342 M.2
  Bottom Layer w0.15: RP2040.9 141.594,79.222 154.194,91.822 209.794,91.822 212.674,94.702 M.2
COL9: 8.2 ,.2 ALTR.2 I.2 K.2 RP2040.11 | length 202.6
  Top Layer w0.15: 8.2 217.214,148.422 I.2 222.114,134.002 K.2 231.674,110.342 231.674,100.902 248.074,84.502 ALTR.2
  Bottom Layer w0.15: RP2040.11 141.815,78.422 142.208,78.029 146.201,78.029 149.794,81.622 149.794,82.822 157.794,90.822 231.194,90.822 231.674,91.302 231.674,100.902
COL10: 9.2 ..2 FN.2 L.2 O.2 RP2040.12 | length 224.3
  Top Layer w0.15: 9.2 236.214,148.422 O.2 241.114,134.002 L.2 250.574,110.442 ..2 269.574,81.902 FN.2
  Bottom Layer w0.15: RP2040.12 141.58,78.022 142.208,77.394 142.279,77.323 146.295,77.323 150.293,81.321 150.293,82.822 157.294,89.822 247.194,89.822 250.574,93.202 ..2
COL11: 0.2 ;.2 ?.2 MENU.2 P.2 RP2040.13 | length 248.7
  Top Layer w0.15: 0.2 255.214,148.422 P.2 260.114,134.002 260.114,119.902 269.574,110.442 ?.2 288.574,81.902 MENU.2
  Bottom Layer w0.15: RP2040.13 141.345,77.622 142.208,76.759 142.345,76.622 146.394,76.622 150.694,80.922 150.694,82.722 156.794,88.822 265.194,88.822 269.574,93.202 ?.2
COL12: '.2 -.2 [.2 CTRLR.2 RP2040.14 RSHIFT.2 | length 288.4
  Top Layer w0.15: -.2 274.214,148.422 [.2 279.114,134.002 '.2 288.194,110.822 299.194,110.822 305.174,104.842 RSHIFT.2 319.474,86.602 CTRLR.2
  Bottom Layer w0.15: RP2040.14 141.18,77.221 142.13,76.271 142.193,76.271 146.643,76.272 151.195,80.823 151.195,82.644 156.872,88.321 285.693,88.321 289.193,91.821 303.193,91.821 305.174,93.802 RSHIFT.2
COL13: =.2 \.2 ].2 BACKSPACE.2 ENTER.2 RP2040.15 | length 306.2
  Top Layer w0.15: ENTER.2@309.874,119.902 309.874,122.242 ].2 293.214,148.422 =.2 312.734,157.902 317.014,153.622 \.2@317.014,138.902
  Bottom Layer w0.15: RP2040.15 137.245,75.822 146.694,75.822 151.695,80.823 151.695,82.522 151.995,82.822 157.194,87.821 286.193,87.821 289.193,90.823 306.694,90.822 309.874,94.002 ENTER.2@309.874,119.902
CTRLR_1: CTRLR.1 D60.2 | length 2.1
  Bottom Layer w0.15: D60.2 313.124,80.157 CTRLR.1
D61_2: D61.2 SPACE.MX2 | length 6.3
  Bottom Layer w0.15: SPACE.MX2@177.174,71.742 177.254,71.822 D61.2
D_1: D32.2 D.1 | length 4.3
  Bottom Layer w0.15: D32.2 118.919,117.362 D.1
DD: R7.1 USB1.A7 USB1.B7 | length 107.1
  Bottom Layer w0.35: 58.704,154.322 58.704,155.663 58.704,156.792 59.034,157.122 59.434,157.122 59.704,156.852 USB1.A7@59.704,155.677
  Bottom Layer w0.8: 58.704,154.322 68.196,146.024 ; 68.195,146.022 68.195,120.823 87.194,101.821 87.194,92.822 93.194,86.823 R7.1@113.194,86.823
DU: R6.2 USB1.A6 USB1.B6 | length 102.7
  Bottom Layer w0.35: USB1.A6 59.205,154.867 59.534,154.622 60.004,154.622 ; USB1.B6 60.204,154.822 60.004,154.622 ; 60.734,154.322 60.434,154.622 60.004,154.622
  Bottom Layer w0.8: 60.734,154.322 71.194,145.213 ; 71.194,145.212 71.194,121.822 89.194,103.81 89.194,93.828 94.194,88.822 R6.2
E_1: D18.2 E.1 | length 3.4
  Bottom Layer w0.15: D18.2 114.919,136.362 E.1
ENTER_1: D41.2 ENTER.1 | length 9.6
  Bottom Layer w0.15: D41.2 293.969,117.362 ENTER.1@303.524,117.362
ESC_1: D1.2 ESC.1 | length 15.1
  Top Layer w0.15: v1(47.134,157.122) 52.634,157.121 55.654,154.101 57.033,152.722 v1(57.034,151.922)
  Bottom Layer w0.2: D1.2 47.099,157.087 v1(47.134,157.122)
  Bottom Layer w0.4: ESC.1 57.034,150.312 v1(57.034,151.922)
F_1: D33.2 F.1 | length 4.3
  Bottom Layer w0.15: D33.2 137.919,117.362 F.1
FN_1: D58.2 FN.1 | length 2.3
  Bottom Layer w0.15: D58.2 265.524,79.757 FN.1
G_1: D34.2 G.1 | length 4.3
  Bottom Layer w0.15: D34.2 156.919,117.362 G.1@158.764,117.362
GND: C1.1 C2.1 C3.1 C4.1 C5.1 C6.1 C7.1 C8.1 C9.1 C10.1 C11.2 C12.2 C13.2 C14.1 C15.1 C16.1 C17.1 C18.1 R1.2 RP2040.19 RP2040.57 SJ1.1 SJ2.1 U3.4 U5.2 USB1.0 USB1.1 USB1.2 USB1.3 USB1.A1 USB1.A12 USB1.B1 USB1.B12 | length 272.1
  Top Layer w0.2: v1(55.734,153.122) 55.734,152.022 54.734,151.022 54.734,149.822 v1@57.334,147.222 ; v1(136.194,80.822) 138.194,82.822 v1(140.194,82.822) ; v1(138.194,68.822) SJ1.1 ; v1(143.594,85.122) 145.194,83.522 v1(145.194,78.822) 151.194,72.822 151.194,69.822 ; SJ2.1 147.294,70.222 v1(147.294,68.822) 150.194,68.822 151.134,69.762
  Top Layer w0.25: v1(125.494,77.422) v1(125.494,81.722)
  Bottom Layer w0.2: v1(55.734,153.122) 56.105,153.492 USB1.A1 ; v1@57.334,147.222 57.367,147.189 59.187,147.189 ; C5.1 122.994,81.722 v1@125.494,81.712 ; v1(125.494,77.422) 125.534,77.382 C14.1 130.835,71.077 C16.1 133.594,70.077 133.694,70.077 134.949,68.822 v1(138.194,68.822) v1(147.294,68.822) 153.784,68.822 158.739,73.777 C10.1 C9.1 ; RP2040.19 135.194,78.822 RP2040.57 135.194,79.822 v1(136.194,80.822) ; C17.1 C8.1 C11.2 139.939,89.422 140.194,89.422 140.794,88.822 140.794,87.522 141.444,87.072 U3.4 ; C3.1 143.496,85.122 v1(143.594,85.122) 143.594,88.322 142.495,89.421 140.194,89.421 ; v1(140.194,82.822) 141.195,82.821 ; C6.1 v1(145.194,78.822)
  Bottom Layer w0.25: USB1.A1 USB1.B12@56.434,155.332 ; USB1.B12 55.898,155.662 USB1.0 USB1.3 USB1.2 USB1.1 63.011,155.662 USB1.A12 ; U5.2@60.193,147.822 59.794,147.822 59.187,147.189 59.194,146.577 C7.1 C18.1 ; C13.2@132.394,90.866 C4.1 130.029,88.467 130.994,88.467 131.239,88.222 131.794,88.222 132.094,87.922 132.694,87.922 133.239,88.467 C2.1 C1.1 ; C13.2 C17.1
  Bottom Layer w0.35: USB1.2 64.199,160.61 R1.2 ; C18.1 65.194,143.277 65.194,118.822 84.194,99.822 84.194,91.822 91.694,84.322 117.194,84.422 ; 117.194,84.43 119.394,82.522 C5.1
  other v1: 57.334,147.222
H_1: D35.2 H.1 | length 4.3
  Bottom Layer w0.15: D35.2 175.919,117.362 H.1
I_1: D23.2 I.1 | length 3.4
  Bottom Layer w0.15: D23.2 209.919,136.362 I.1
J_1: D36.2 J.1 | length 4.3
  Bottom Layer w0.15: D36.2 194.919,117.362 J.1
K_1: D37.2 K.1 | length 4.3
  Bottom Layer w0.15: D37.2 213.919,117.362 K.1
L_1: D38.2 L.1 | length 4.3
  Bottom Layer w0.15: D38.2 232.919,117.362 L.1
LCTRL_1: D54.2 LCTRL.1 | length 12.7
  Bottom Layer w0.15: LCTRL.1 63.389,79.362 D54.2
M_1: D49.2 M.1 | length 3.8
  Bottom Layer w0.15: D49.2 204.919,98.362 M.1
MENU_1: D59.2 MENU.1 | length 2.2
  Bottom Layer w0.15: D59.2 289.324,79.957 MENU.1
N_1: D48.2 N.1 | length 3.8
  Bottom Layer w0.15: D48.2 185.919,98.362 N.1
O_1: D24.2 O.1 | length 3.4
  Bottom Layer w0.15: D24.2 228.919,136.362 O.1
P_1: D25.2 P.1 | length 3.4
  Bottom Layer w0.15: D25.2 247.919,136.362 P.1
Q_1: D16.2 Q.1 | length 3.4
  Bottom Layer w0.15: D16.2 76.919,136.362 Q.1
QSPI_SCLK: RP2040.52 U3.6 | length 6.4
  Bottom Layer w0.15: RP2040.52 135.194,84.322 137.094,86.222 137.094,87.222 137.444,87.572 U3.6
QSPI_SD0: RP2040.53 U3.5 | length 5.4
  Bottom Layer w0.15: RP2040.53@135.594,83.371 135.594,84.222 137.395,86.023 137.394,86.522 137.944,87.072 U3.5
QSPI_SD1: RP2040.55 U3.2 | length 10.5
  Bottom Layer w0.15: RP2040.55 136.394,83.922 136.491,84.019 136.491,84.119 138.094,85.722 138.594,86.223 142.495,86.223 142.894,86.622 142.894,87.521 142.343,88.072 U3.2
QSPI_SD2: RP2040.54 U3.3 | length 9.7
  Bottom Layer w0.15: RP2040.54@135.995,83.371 135.995,84.123 138.396,86.523 142.094,86.522 142.494,86.922 142.494,87.322 142.244,87.572 U3.3
QSPI_SD3: RP2040.51 U3.7 | length 7.1
  Bottom Layer w0.15: RP2040.51 134.794,84.522 136.694,86.422 136.694,87.422 137.344,88.072 U3.7
QSPI_SS: RP2040.56 SJ2.2 U3.1 | length 31.5
  Top Layer w0.2: v1@140.694,84.821 141.194,84.321 141.194,75.822 145.194,71.822 v1(148.494,71.822) SJ2.2
  Bottom Layer w0.15: RP2040.56 139.144,85.722 142.494,85.722 143.194,86.422 143.194,87.922 142.544,88.572 U3.1 ; v1@140.694,84.821 140.705,85.723
  other v1: 140.694,84.821
R1_1: 
  other v2: 117.087,117.664
R2_1: R2.1 U5.3 | length 1.2
  Bottom Layer w0.4: U5.3@60.194,148.772 60.667,149.245 R2.1
R_1: D19.2 R.1 | length 3.4
  Bottom Layer w0.15: D19.2 133.919,136.362 R.1
ROW1: D1.1 D2.1 D3.1 D4.1 D5.1 D6.1 D7.1 D8.1 D9.1 D10.1 D11.1 D12.1 D13.1 RP2040.34 | length 402.4
  Top Layer w0.15: v1(53.134,159.322) 70.394,159.322 71.894,160.822 v1(72.194,160.822)
  Bottom Layer w0.15: D1.1 44.934,158.762 44.934,142.762 48.195,138.822 48.195,75.322 50.994,72.522 108.994,72.522 114.694,78.222 127.594,78.222 128.594,79.222 RP2040.34 ; D1.1@46.195,160.557 47.429,159.323 v1@53.134,159.323 ; v1(72.194,160.822) 77.929,160.822 D2.1 D13.1
ROW2: D15.1 D16.1 D17.1 D18.1 D19.1 D20.1 D21.1 D22.1 D23.1 D24.1 D25.1 D26.1 D27.1 RP2040.35 | length 386.5
  Top Layer w0.15: v1(64.194,141.822) v1(72.194,141.822)
  Bottom Layer w0.15: v1(64.194,141.822) 63.929,141.557 D15.1 48.495,138.858 48.495,75.522 51.195,72.822 107.095,72.822 107.194,72.921 108.795,72.921 114.494,78.621 127.395,78.621 128.393,79.622 RP2040.35 ; v1(72.194,141.822) 72.459,141.557 D16.1 D27.1
ROW3: D29.1 D30.1 D31.1 D32.1 D33.1 D34.1 D35.1 D36.1 D37.1 D38.1 D39.1 D40.1 D41.1 RP2040.36 | length 373.9
  Top Layer w0.15: v1(64.194,122.822) v1(72.194,122.822)
  Bottom Layer w0.15: v1(64.194,122.822) 63.929,122.557 D29.1 48.894,118.257 48.894,75.622 51.294,73.222 108.594,73.222 114.395,79.022 127.194,79.022 128.195,80.023 RP2040.36 ; v1(72.194,122.822) 72.459,122.557 D30.1 D40.1 285.224,122.557 D41.1
ROW4: D14.1 D42.1 D43.1 D44.1 D45.1 D46.1 D47.1 D48.1 D49.1 D50.1 D51.1 D52.1 D53.1 RP2040.37 | length 400.6
  Top Layer w0.15: v1(76.194,105.822) v1(89.194,105.822) ; v1@288.194,114.822 v1(288.194,121.822)
  Bottom Layer w0.15: v1(76.194,105.822) 60.459,105.822 58.194,103.557 49.194,94.557 49.194,75.822 51.494,73.522 108.394,73.522 114.293,79.421 126.994,79.421 127.994,80.422 RP2040.37 ; v1(89.194,105.822) 91.459,103.557 95.194,103.557 260.194,103.557 280.124,103.557 D53.1 ; 280.195,103.486 288.194,111.485 v1@288.194,114.822 ; v1(288.194,121.822) 292.194,121.822 D14.1@306.193,145.088
  other v1: 89.194,105.822 288.194,114.822
ROW5: D28.1 D54.1 D55.1 D56.1 D57.1 D58.1 D59.1 D60.1 D61.1 RP2040.38 | length 342.1
  Top Layer w0.15: v1(96.193,74.088) v1(102.46,67.821)
  Bottom Layer w0.15: D54.1 77.978,75.088 78.604,74.462 81.534,74.462 82.16,75.088 D56.1 102.134,74.062 107.135,74.062 109.459,75.088 114.193,79.823 126.794,79.823 127.795,80.821 RP2040.38@130.645,80.821 ; D56.1 v1(96.193,74.088) ; v1@102.458,67.822 102.458,68.023 183.129,68.023 186.929,71.823 227.459,71.822 D57.1 D60.1 ; 307.394,84.557 307.929,84.557 311.194,88.822 311.194,105.822 314.194,108.822 314.194,123.087 D28.1
RP2040_2: RP2040.2
RP2040_3: RP2040.3
RP2040_4: RP2040.4
RP2040_16: RP2040.16
RP2040_17: RP2040.17
RP2040_18: RP2040.18
RP2040_24: RP2040.24
RP2040_25: RP2040.25
RP2040_27: RP2040.27
RP2040_28: RP2040.28
RP2040_29: RP2040.29
RP2040_30: RP2040.30
RP2040_31: RP2040.31
RP2040_32: RP2040.32
RP2040_DD: R7.2 RP2040.46 | length 24.1
  Top Layer w0.8: v1(116.194,86.822) 118.693,86.823 120.595,88.723 126.494,88.722 131.494,81.522 132.193,81.522 v1(132.994,82.322)
  Bottom Layer w0.25: RP2040.46 132.794,82.522 v1(132.994,82.322)
  Bottom Layer w0.8: R7.2 v1(116.194,86.822)
RP2040_DU: R6.1 RP2040.47 | length 23.4
  Top Layer w0.8: v1(116.194,88.822) 117.694,88.822 119.694,90.822 126.894,90.822 131.294,84.522 v1(132.994,84.522)
  Bottom Layer w0.25: v1(132.994,84.522) 133.194,84.322 RP2040.47
  Bottom Layer w0.8: R6.1 v1(116.194,88.822)
RSHIFT_1: D53.2 RSHIFT.1 | length 10.1
  Bottom Layer w0.15: D53.2 288.788,98.362 RSHIFT.1
RUN: R4.2 RP2040.26 SJ1.2 | length 13.7
  Top Layer w0.2: v1(131.694,74.522) 132.394,73.822 137.194,73.822 139.194,71.822 v1(139.494,71.822) SJ1.2
  Bottom Layer w0.2: R4.2 v1(131.694,74.522) 132.394,75.222 RP2040.26
S$12036: 
S$98945: 
S_1: D31.2 S.1 | length 4.3
  Bottom Layer w0.15: D31.2 99.919,117.362 S.1
SHIFTL_1: D42.2 SHIFTL.1 | length 3.8
  Bottom Layer w0.15: D42.2 59.919,98.362 SHIFTL.1
T_1: D20.2 T.1 | length 3.4
  Bottom Layer w0.15: D20.2 152.919,136.362 T.1
TAB_1: D15.2 TAB.1 | length 3.7
  Bottom Layer w0.15: D15.2 52.919,136.362 TAB.1@54.224,136.362
U3_9: U3.9
U5_4: U5.4
U_1: D22.2 U.1 | length 3.4
  Bottom Layer w0.15: D22.2 190.919,136.362 U.1
USB1_A8: USB1.A8
USB1_B8: USB1.B8
V_1: D46.2 V.1 | length 4.8
  Bottom Layer w0.15: D46.2 146.919,98.362 V.1
VCC: C7.2 R2.2 U5.1 USB1.A4 USB1.A9 USB1.B4 USB1.B9 | length 30.6
  Top Layer w0.4: v1(56.934,154.122) v1(62.734,154.122)
  Bottom Layer w0.4: USB1.A4@56.904,155.663 v1(56.934,154.122) 56.934,153.122 54.734,150.922 54.734,149.422 55.734,148.422 58.401,148.422 R2.2 59.801,150.289 60.334,150.822 61.135,150.822 61.834,150.222 61.834,149.822 C7.2@61.397,145.467 ; U5.1@60.194,146.872 60.194,146.667 C7.2@61.394,145.467 ; USB1.B4@61.834,155.663 61.834,155.152 61.934,154.622 62.234,154.422 v1@62.735,154.121
VDD: C1.2 C2.2 C3.2 C4.2 C5.2 C6.2 C8.2 C11.1 C12.1 C14.2 C15.2 C18.2 R4.1 RP2040.1 RP2040.10 RP2040.22 RP2040.33 RP2040.42 RP2040.43 RP2040.44 RP2040.48 RP2040.49 U3.8 U5.5 | length 215.1
  Top Layer w0.25: v1(130.394,73.322) 132.494,71.222 v1(135.394,71.222)
  Top Layer w0.35: v1(126.694,77.422) 128.194,78.922 v1(128.194,83.822) ; 139.493,86.632 140.184,86.632 143.394,83.422 v1(143.394,79.822) ; v1(139.494,83.422) v1(139.494,87.322)
  Bottom Layer w0.25: C5.2@123.539,82.522 130.544,82.522 RP2040.42 ; v1(130.394,73.322) 129.561,74.155 R4.1 128.48,74.522 C14.2 127.349,76.378 129.793,78.822 RP2040.33 ; RP2040.43 131.594,85.022 130.016,86.6 C4.2 130.029,87.377 C12.1@130.994,87.377 ; RP2040.44 131.994,85.222 130.994,86.222 C12.1@130.994,87.377 ; RP2040.48 133.594,86.522 133.994,86.922 C2.2 ; RP2040.22 133.994,74.222 133.694,73.922 133.694,71.167 135.339,71.167 v1(135.394,71.222) ; RP2040.49 133.994,85.522 134.994,86.522 C1.2 ; RP2040.10 C6.2@142.775,78.822 ; RP2040.1@137.743,82.421 138.494,82.422 C3.2 ; U3.8 138.686,89.585 C11.1 C8.2 137.494,89.122 135.749,87.377 C1.2 ; C12.1@130.994,87.377 C2.2 ; C2.2 C1.2
  Bottom Layer w0.35: U5.5 64.094,145.572 C18.2@64.094,145.467 ; C18.2 65.549,145.466 66.194,144.821 66.194,119.822 85.195,100.821 85.195,92.82 92.694,85.321 118.194,85.322 120.934,85.322 123.234,83.022 C5.2@123.539,82.522 ; 118.195,85.321 121.195,87.821 124.195,87.821 ; 124.194,87.822 126.762,87.39 C4.2 ; C14.2 126.624,77.352 v1(126.694,77.422) ; 127.438,87.39 128.195,86.633 v1@128.195,83.823 ; U3.8 139.244,88.572 139.494,88.322 v1(139.494,87.322) ; C3.2 139.494,82.422 v1(139.494,83.422) ; C6.2 142.806,79.234 v1(143.394,79.822)
W_1: D17.2 W.1 | length 3.4
  Bottom Layer w0.15: D17.2 95.919,136.362 W.1
WIN_1: D55.2 WIN.1 | length 4.9
  Bottom Layer w0.15: D55.2 72,79.362 WIN.1
X_1: D44.2 X.1 | length 3.8
  Bottom Layer w0.15: D44.2 109.919,98.362 X.1
XIN: C9.2 RP2040.20 U4.1 | length 26.9
  Bottom Layer w0.15: RP2040.20 134.794,75.222 135.194,74.822 146.194,74.822 152.295,80.722 ; 152.294,80.722 U4.1 155.294,81.822 C9.2
XOUT: R3.1 RP2040.21 | length 17
  Bottom Layer w0.15: RP2040.21 134.394,74.622 135.194,73.822 R3.1
XOUT_C: C10.2 R3.2 U4.2 | length 10
  Bottom Layer w0.15: U4.2 157.649,78.377 C10.2
  Bottom Layer w0.2: R3.2 152.047,74.922 U4.2
Y_1: D21.2 Y.1 | length 3.4
  Bottom Layer w0.15: D21.2 171.919,136.362 Y.1
Z_1: D43.2 Z.1 | length 3.6
  Bottom Layer w0.15: Z.1 94.049,100.087 D43.2
pads on no net: 0. 1. 2. 3. 4. 5. 6. 7. 8. 9. '. ,. -. .. ;. =. ?. [. \. ]. A. ALTL. ALTR. B. BACKSPACE. C. CAPS. CTRLR. D. E. ENTER. ESC. F. FN. G. H. I. J. K. L. LCTRL. M. MENU. N. O. P. Q. R. RSHIFT. S. SHIFTL. SPACE. T. TAB. U. USB1. V. W. WIN. X. Y. Z.

## Keep-outs
Keep-Out Layer:
  lines w0.254 net S$12036: 44.134,68.722 ccw(c46.134,68.722) 46.134,66.722 ; 44.134,69.722 ccw(c46.134,69.722) 46.134,67.722 ; 44.134,159.722 cw(c46.134,159.722) 46.134,161.722 ; 44.134,160.722 cw(c46.134,160.722) 46.134,162.722 ; 326.134,67.722 ccw(c326.134,69.722) 328.134,69.722 ; 326.134,161.722 cw(c326.134,159.722) 328.134,159.722

## Other copper
Top Layer:
  text "RUN" at 154.134,62.151 h1.14
  text "BOOT" at 163.134,62.151 h1.14

## Text inside footprints (layer, text, board x,y; h text height)
0: Document "1U" at 95.194,306.187 h1.27
1: Document "1U" at 66.241,146.234 h1.27
2: Document "1U" at 85.241,146.234 h1.27
3: Document "1U" at 104.241,146.234 h1.27
4: Document "1U" at 123.241,146.234 h1.27
5: Document "1U" at 142.241,146.234 h1.27
6: Document "1U" at 161.241,146.234 h1.27
7: Document "1U" at 180.241,146.234 h1.27
8: Document "1U" at 199.241,146.234 h1.27
9: Document "1U" at 218.241,146.234 h1.27
': Document "1U" at 270.621,108.234 h1.27
,: Document "1U" at 223.181,89.234 h1.27
-: Document "1U" at 256.241,146.234 h1.27
.: Document "1U" at 242.081,89.234 h1.27
;: Document "1U" at 251.621,108.234 h1.27
=: Document "1U" at 275.241,146.234 h1.27
?: Document "1U" at 261.081,89.234 h1.27
[: Document "1U" at 265.721,127.234 h1.27
\: Document "1.5U" at 308.521,127.234 h1.27
]: Document "1U" at 284.721,127.234 h1.27
A: Document "1U" at 80.621,108.234 h1.27
ALTL: Document "1.25U" at 97.434,70.222 h1.2
ALTR: Document "1.25U" at 239.534,70.222 h1.2
B: Document "1U" at 166.181,89.234 h1.27
BACKSPACE: Document "2U" at 303.781,146.234 h1.27
C: Document "1U" at 128.181,89.234 h1.27
CAPS: Document "1.75U" at 54.381,108.234 h1.27
CTRLR: Document "1.25U" at 310.934,70.222 h1.2
D: Document "1U" at 118.621,108.234 h1.27
E: Document "1U" at 113.721,127.234 h1.27
ENTER: Document "2.25U" at 301.381,108.234 h1.27
ESC: Document "1U" at 59.147,159.41 h1.27 r180
F: Document "1U" at 137.621,108.234 h1.27
FN: Document "1.25U" at 263.334,70.222 h1.2
G: Document "1U" at 156.621,108.234 h1.27
H: Document "1U" at 175.621,108.234 h1.27
I: Document "1U" at 208.721,127.234 h1.27
J: Document "1U" at 194.621,108.234 h1.27
K: Document "1U" at 213.621,108.234 h1.27
L: Document "1U" at 232.621,108.234 h1.27
LCTRL: Document "1.25U" at 49.634,70.222 h1.2
M: Document "1U" at 204.181,89.234 h1.27
MENU: Document "1.25U" at 287.134,70.222 h1.2
N: Document "1U" at 185.181,89.234 h1.27
O: Document "1U" at 227.721,127.234 h1.27
P: Document "1U" at 246.721,127.234 h1.27
Q: Document "1U" at 75.721,127.234 h1.27
R: Document "1U" at 132.721,127.234 h1.27
RSHIFT: Document "2.75U" at 296.681,89.234 h1.27
S: Document "1U" at 99.621,108.234 h1.27
SHIFTL: Document "2.25U" at 59.181,89.234 h1.27
T: Document "1U" at 151.721,127.234 h1.27
TAB: Document "1.5U" at 52.011,127.234 h1.27
U: Document "1U" at 189.721,127.234 h1.27
V: Document "1U" at 147.181,89.234 h1.27
W: Document "1U" at 94.721,127.234 h1.27
WIN: Document "1.25U" at 73.534,70.222 h1.2
X: Document "1U" at 109.181,89.234 h1.27
Y: Document "1U" at 170.721,127.234 h1.27
Z: Document "1U" at 90.181,89.234 h1.27